# Altium PCB my_bcd_clock.PcbDoc
Units mm, origin at the board's own origin, x right, y up, seen from the top; angles counter-clockwise.
Board outline 91.25 x 54.75 mm, 2 copper layers (Top Layer, Bottom Layer); 50 components, 32 nets, 138 pads, 6 vias.
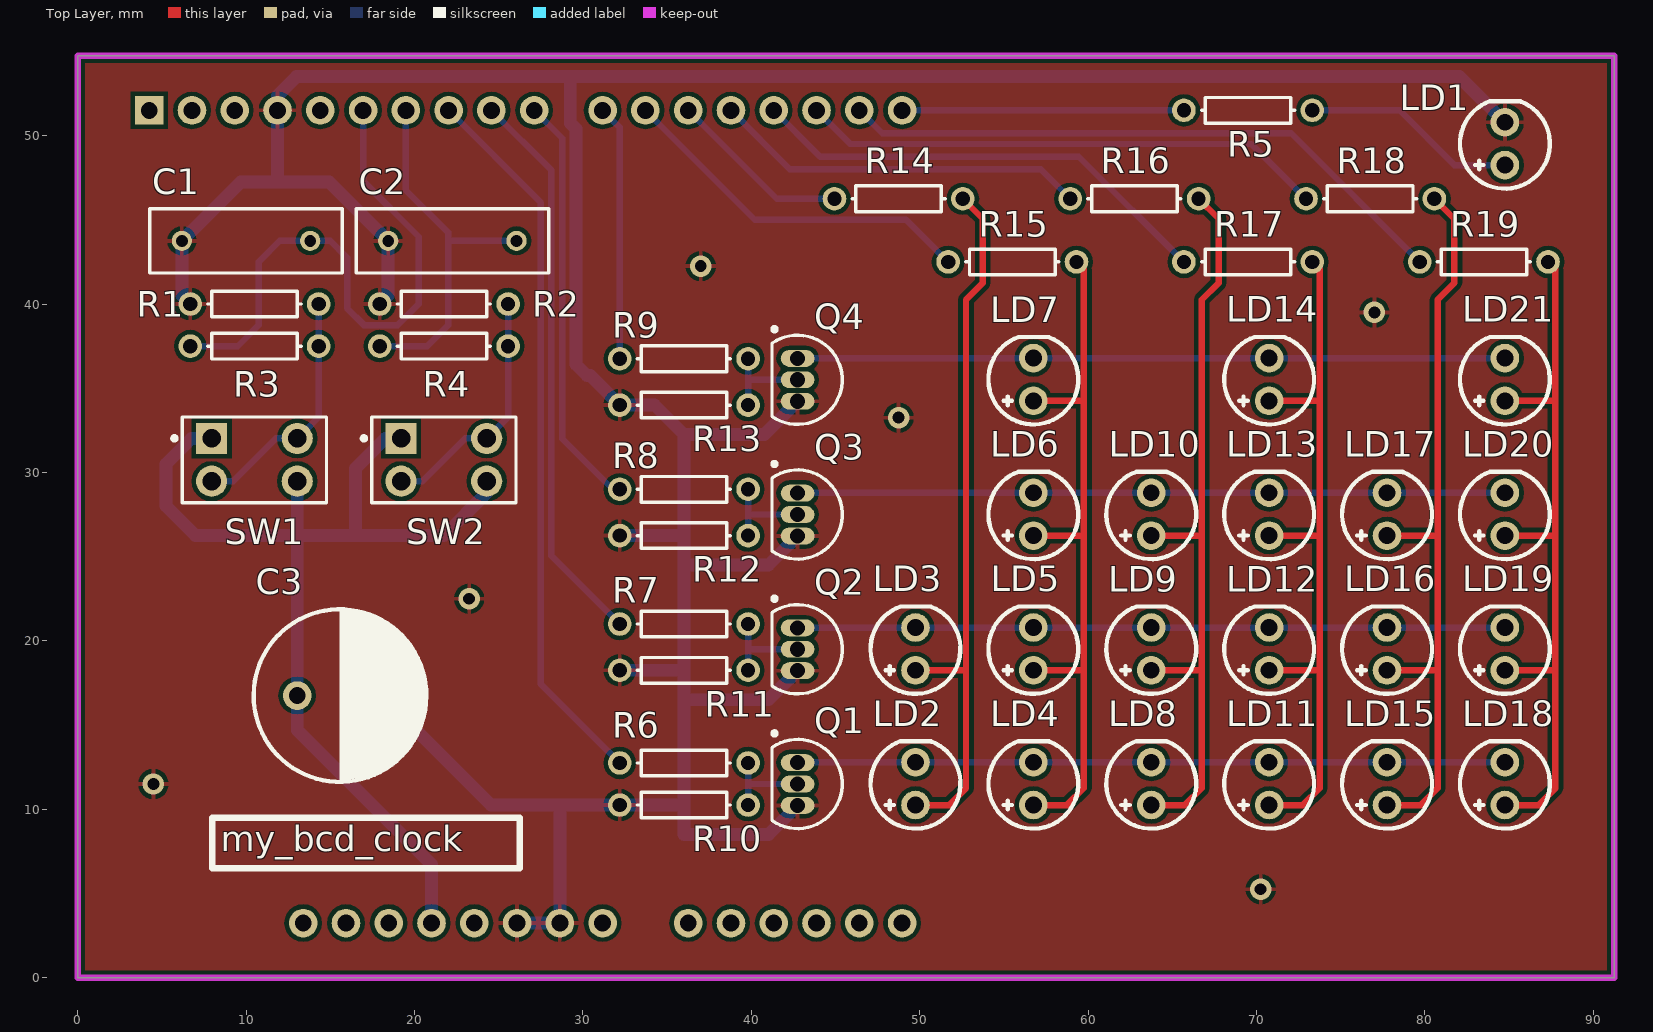
[diagram p0: Top Layer view]
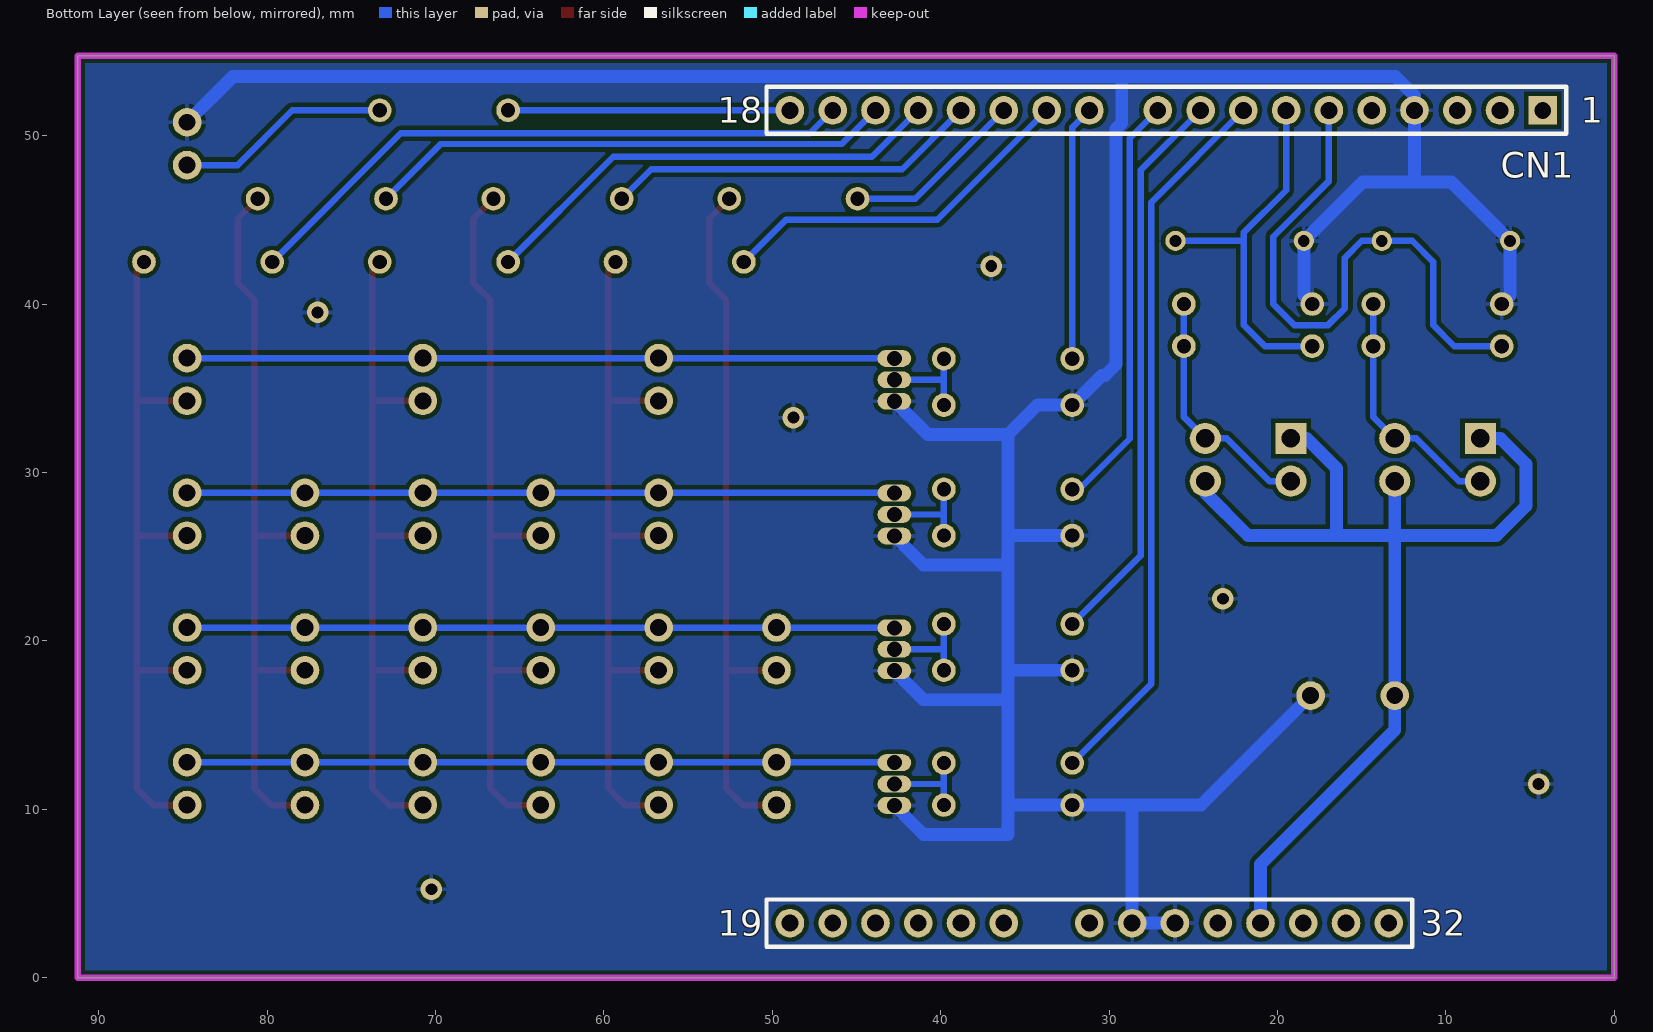
[diagram p1: Bottom Layer view, seen from below]

## Layer stack, top to bottom
Top Solder: solder mask 0.0102, Solder Resist, Dk 3.5
Top Layer: signal copper 0.0356
Dielectric1: dielectric 0.32, FR-4, Dk 4.8
Bottom Layer: signal copper 0.0356
Bottom Solder: solder mask 0.0102, Solder Resist, Dk 3.5

## Board outline
0,0 0,54.75 91.25,54.75 91.25,0

## Design rules (kind name [scope] priority, off if disabled: settings)
Clearance [All] p1: gap=0.254
FabricationTestPointUsage TestPointUsage [All] p1: valid=0 allowmultiple=FALSE
FabricationTestpoint Testpoint [All] p1: side=3 testpointundercomponent=TRUE minsize=1.016 maxsize=2.54 preferedsize=1.524 minholesize=0 maxholesize=1.016 preferedholesize=0.813 testpointgrid=0.025 allowsidetop=TRUE allowsidebottom=TRUE usegrid=TRUE gridtolerance=0
PolygonConnect [All] p1: connectstyle=Relief reliefconductorwidth=0.254 reliefentries=4 polygonreliefangle="90 Angle" airgapwidth=0.254
RoutingVias [All] p1: holewidth=0.711 width=1.27 viastyle="Through Hole" minholewidth=0.711 minwidth=1.27 maxholewidth=0.711 maxwidth=1.27
SilkToSolderMaskClearance SilkscreenOverComponentPads [IsPad] p1: minsilkscreentomaskgap=0.254 clearancetoexposedcopper=TRUE
SolderMaskExpansion [All] p1: expansion=0.102
Width [All] p1: maxlimit=2 minlimit=0.254 preferedwidth=0.381
27 further rules are at their usual default settings.

## Components (designator, comment, footprint, x,y, rotation, side; value= is the part's Value field where it differs from the comment)
C1 "10000pF" RAD-0.3 10,43.75 r180 top
C2 "10000pF" RAD-0.3 22.25,43.75 r180 top
C3 "10uF" RADIAL_CAN_5MM 13.04,16.75 r90 top
CN1 "ARDUINO_UNO_CONNECTOR" ARDUINO_UNO_CONNECTOR 4.25,51.5 r270 bottom
LD1 "LED_2.54MM" LED_2.54MM 84.75,48.25 r180 top
LD2 "LED_2.54MM" LED_2.54MM 49.75,10.25 r180 top
LD3 "LED_2.54MM" LED_2.54MM 49.75,18.25 r180 top
LD4 "LED_2.54MM" LED_2.54MM 56.75,10.25 r180 top
LD5 "LED_2.54MM" LED_2.54MM 56.75,18.25 r180 top
LD6 "LED_2.54MM" LED_2.54MM 56.75,26.25 r180 top
LD7 "LED_2.54MM" LED_2.54MM 56.75,34.25 r180 top
LD8 "LED_2.54MM" LED_2.54MM 63.75,10.25 r180 top
LD9 "LED_2.54MM" LED_2.54MM 63.75,18.25 r180 top
LD10 "LED_2.54MM" LED_2.54MM 63.75,26.25 r180 top
LD11 "LED_2.54MM" LED_2.54MM 70.75,10.25 r180 top
LD12 "LED_2.54MM" LED_2.54MM 70.75,18.25 r180 top
LD13 "LED_2.54MM" LED_2.54MM 70.75,26.25 r180 top
LD14 "LED_2.54MM" LED_2.54MM 70.75,34.25 r180 top
LD15 "LED_2.54MM" LED_2.54MM 77.75,10.25 r180 top
LD16 "LED_2.54MM" LED_2.54MM 77.75,18.25 r180 top
LD17 "LED_2.54MM" LED_2.54MM 77.75,26.25 r180 top
LD18 "LED_2.54MM" LED_2.54MM 84.75,10.25 r180 top
LD19 "LED_2.54MM" LED_2.54MM 84.75,18.25 r180 top
LD20 "LED_2.54MM" LED_2.54MM 84.75,26.25 r180 top
LD21 "LED_2.54MM" LED_2.54MM 84.75,34.25 r180 top
Q1 "2N2222" TO-226-AA 42.75,11.5 r180 top
Q2 "2N2222" TO-226-AA 42.75,19.5 r180 top
Q3 "2N2222" TO-226-AA 42.75,27.5 r180 top
Q4 "2N2222" TO-226-AA 42.75,35.5 r180 top
R1 "1K" AXIAL-0.3 10.5,40 r0 top
R2 "1K" AXIAL-0.3 21.75,40 r0 top
R3 "1K" AXIAL-0.3 10.5,37.5 r180 top
R4 "1K" AXIAL-0.3 21.75,37.5 r180 top
R5 "220R" AXIAL-0.3 69.5,51.5 r180 top
R6 "1K" AXIAL-0.3 36,12.75 r180 top
R7 "1K" AXIAL-0.3 36,21 r0 top
R8 "1K" AXIAL-0.3 36,29 r0 top
R9 "1K" AXIAL-0.3 36,36.75 r0 top
R10 "1K" AXIAL-0.3 36,10.25 r0 top
R11 "1K" AXIAL-0.3 36,18.25 r0 top
R12 "1K" AXIAL-0.3 36,26.25 r0 top
R13 "1K" AXIAL-0.3 36,34 r180 top
R14 "220R" AXIAL-0.3 48.75,46.25 r0 top
R15 "220R" AXIAL-0.3 55.5,42.5 r0 top
R16 "220R" AXIAL-0.3 62.75,46.25 r0 top
R17 "220R" AXIAL-0.3 69.5,42.5 r0 top
R18 "220R" AXIAL-0.3 76.75,46.25 r0 top
R19 "220R" AXIAL-0.3 83.5,42.5 r0 top
SW1 "SW-DPST" DPST-4 10.5,30.75 r0 top
SW2 "SW-DPST" DPST-4 21.75,30.75 r0 top

## Footprints (in the part's own frame and the unit in brackets; to place one, negate y for a bottom-side part, rotate by r counter-clockwise, add the part's x,y. Pads: shape width x height; smd on the part's side, far side on the other; paste and mask are expansions set on the pad)
ARDUINO_UNO_CONNECTOR [mm]
  rect 1.7x1.7 hole 1: 1(0,0)
  round 1.7 hole 1: 2(0,-2.54) 3(0,-5.08) 4(0,-7.62) 5(0,-10.16) 6(0,-12.7) 7(0,-15.24) 8(0,-17.78) 9(0,-20.32) 10(0,-22.86) 11(0,-26.924) 12(0,-29.464) 13(0,-32.004) 14(0,-34.544) 15(0,-37.084) 16(0,-39.624) 17(0,-42.164) 18(0,-44.704) 19(48.26,-44.704) 20(48.26,-42.164) 21(48.26,-39.624) 22(48.26,-37.084) 23(48.26,-34.544) 24(48.26,-32.004) 25(48.26,-26.924) 26(48.26,-24.384) 27(48.26,-21.844) 28(48.26,-19.304) 29(48.26,-16.764) 30(48.26,-14.224) 31(48.26,-11.684) 32(48.26,-9.144)
  silkscreen extent -1.4,-46.1 49.66,1.4
AXIAL-0.3 [mm] "Axial Device, Thru-Hole; 2 Leads; 0.3 in Pin Spacing"
  round 1.4 hole 0.85: 1(-3.81,0) 2(3.81,0)
  silkscreen extent -2.77,-0.76 2.77,0.76
DPST-4 [mm] "Switch; 4 Leads"
  rect 1.85x1.85 hole 1.1: 1(-2.54,1.27)
  round 1.85 hole 1.1: 2(-2.54,-1.27) 3(2.54,-1.27) 4(2.54,1.27)
  silkscreen extent -4.88,-2.54 4.28,2.54
LED_2.54MM [mm]
  round 1.7 hole 1: 1(0,0) 2(0,-2.54)
  silkscreen extent -2.67,-3.79 2.67,1.4
RAD-0.3 [mm] "Radial Cap, Thru-Hole; 2 Leads; 0.3 in Pin Spacing"
  round 1.2 hole 0.7: 1(-3.81,0) 2(3.81,0)
  silkscreen extent -5.71,-1.9 5.71,1.91
RADIAL_CAN_5MM [mm]
  round 1.7 hole 1: 1(0,0) 2(0,-5)
  silkscreen extent -5.12,-7.75 5.12,2.59
TO-226-AA [mm] "TO, Flat Index; 3 In-Line, Axial Leads; Body Dia. 4.8mm; Leads 0.55 x 0.51 mm (max)"
  oval 2x1 hole 0.9: 1(0,-1.27) 2(0,0) 3(0,1.27)
  silkscreen extent -2.65,-3.13 1.52,2.65, body extent -2.66,-2.66 1.52,2.66, height 5.33

## Part data
C1 C2: library part Cap, "Capacitor"
C3: library part "Cap Pol1", "Capacitor"
CN1: "Connector"
LD1 LD2 LD3 LD4 LD5 LD6 LD7 LD8 LD9 LD10 LD11 LD12 LD13 LD14 LD15 LD16 LD17 LD18 LD19 LD20 LD21: library part LED0, "LED"
Q1 Q2 Q3 Q4: library part NPN, "NPN"
R1 R2 R3 R4 R5 R6 R7 R8 R9 R10 R11 R12 R13 R14 R15 R16 R17 R18 R19: library part Res1, "Resistor"
SW1 SW2: "Switch"

## Via types
v1: diameter 1.27, hole 0.711, Top Layer to Bottom Layer, 6 vias

## Nets (pads, with @x,y where several pads share a name; then routed paths per layer and width w, separated by ;. In a path a pad name is that pad's centre, name@x,y a point inside that pad or via, vN(x,y) a via of type N, cw(c..) or ccw(c..) an arc to the next point about the centre after c; other vN are vias at no path point)
3V3: C3.1 CN1.29 SW1.1 SW1.3 SW2.1 SW2.3 | length 64.3
  Bottom Layer w0.762: SW1.1 6.77,32.02 5.25,30.5 5.25,28 7,26.25 13.04,26.25 ; SW1.3 13.04,26.25 ; SW2.1 18.27,32.02 16.5,30.25 16.5,26.25 ; CN1.29 21.014,6.736 13.04,14.71 13.04,26.25 ; SW2.3 24.29,28.79 21.75,26.25 16.5,26.25 ; 13.04,26.25 16.5,26.25
ALARM_LED: CN1.18 R5.2 | length 16.7
  Bottom Layer w0.381: CN1.18 R5.2
BUTTON_1: C1.1 CN1.6 R3.2 | length 35.6
  Bottom Layer w0.381: R3.2 9.5,37.5 10.75,38.75 10.75,42.5 12,43.75 C1.1 15,43.75 16,42.75 16,39.75 17,38.75 19,38.75 20.25,40 20.25,44 16.95,47.3 CN1.6
BUTTON_2: C2.1 CN1.7 R4.2 | length 22.4
  Bottom Layer w0.381: R4.2 20.75,37.5 22,38.75 22,43.75 ; CN1.7 19.49,46.76 22,44.25 22,43.75 ; C2.1 22,43.75
COLUMN_0: CN1.13 R14.1 | length 10.9
  Bottom Layer w0.381: CN1.13 41.504,46.25 R14.1
COLUMN_1: CN1.12 R15.1 | length 21.7
  Bottom Layer w0.381: CN1.12 40.214,45 49.19,45 R15.1
COLUMN_2: CN1.14 R16.1 | length 22.3
  Bottom Layer w0.381: CN1.14 42.294,48 57.19,48 R16.1
COLUMN_3: CN1.15 R17.1 | length 28.1
  Bottom Layer w0.381: CN1.15 44.084,48.75 59.44,48.75 R17.1
COLUMN_4: CN1.16 R18.1 | length 31.2
  Bottom Layer w0.381: CN1.16 45.874,49.5 69.69,49.5 R18.1
COLUMN_5: CN1.17 R19.1 | length 37
  Bottom Layer w0.381: CN1.17 47.779,50.135 72.055,50.135 R19.1
GND: C1.2 C2.2 C3.2 CN1.4 CN1.26 CN1.27 LD1.2 Q1.3 Q2.3 Q3.3 Q4.3 R1.1 R2.1 R10.1 R11.1 R12.1 R13.2 | length 219.7
  Bottom Layer w0.762: R1.1 6.19,40.5 C1.2 9.69,47.25 14.94,47.25 C2.2 18.44,40.5 R2.1 ; 11.87,47.25 CN1.4 11.87,52.37 13,53.5 82.04,53.5 LD1.2 ; C3.2 24.54,10.25 28.634,10.25 ; CN1.27 CN1.26 28.634,10.25 ; 29.25,53.5 29.25,50.75 29.596,50.404 29.596,36.404 30.25,35.75 30.44,35.75 R13.2 34.25,34 36,32.25 ; R11.1 36,18.25 ; R12.1 35.75,26.25 36,26.5 ; Q1.3 41.02,8.5 36,8.5 36,10.25 ; Q2.3 41.02,16.5 36,16.5 ; Q3.3 41.02,24.5 36,24.5 ; Q4.3 40.77,32.25 36,32.25 ; 28.634,10.25 R10.1 36,10.25 ; 36,10.25 36,16.5 ; 36,16.5 36,18.25 ; 36,18.25 36,24.5 ; 36,24.5 36,26.5 ; 36,26.5 36,32.25
  other v1: 70.25,5.25 4.5,11.5 23.25,22.5 48.75,33.25 77,39.5 37,42.25
NetLD1_1: LD1.1 R5.1 | length 12.8
  Bottom Layer w0.381: R5.1 78.5,51.5 81.75,48.25 LD1.1
NetLD2_1: LD2.1 LD3.1 R14.2 | length 42.3
  Top Layer w0.381: LD2.1 51.75,10.25 52.75,11.25 52.75,18.25 ; LD3.1 52.75,18.25 ; R14.2 53.75,45.06 53.75,41.25 52.75,40.25 52.75,18.25
NetLD2_2: LD2.2 LD4.2 LD8.2 LD11.2 LD15.2 LD18.2 Q1.1 | length 42
  Bottom Layer w0.381: Q1.1@42.77,12.79 LD2.2 LD4.2 LD8.2 LD11.2 LD15.2 LD18.2
NetLD3_2: LD3.2 LD5.2 LD9.2 LD12.2 LD16.2 LD19.2 Q2.1 | length 42
  Bottom Layer w0.381: Q2.1@42.77,20.79 LD3.2 LD5.2 LD9.2 LD12.2 LD16.2 LD19.2
NetLD4_1: LD4.1 LD5.1 LD6.1 LD7.1 R15.2 | length 43.4
  Top Layer w0.381: LD4.1 58.75,10.25 59.75,11.25 59.75,18.25 ; LD5.1 59.75,18.25 ; LD6.1 59.75,26.25 ; LD7.1 59.655,34.25 ; R15.2@59.56,42.25 59.75,42.06 59.75,26.25 ; 59.75,18.25 59.75,26.25
NetLD6_2: LD6.2 LD10.2 LD13.2 LD17.2 LD20.2 Q3.1 | length 42
  Bottom Layer w0.381: Q3.1@42.77,28.79 LD6.2 LD10.2 LD13.2 LD17.2 LD20.2
NetLD7_2: LD7.2 LD14.2 LD21.2 Q4.1 | length 42
  Bottom Layer w0.381: Q4.1@42.77,36.79 LD7.2 LD14.2 LD21.2
NetLD8_1: LD8.1 LD9.1 LD10.1 R16.2 | length 45.3
  Top Layer w0.381: LD8.1 65.75,10.25 66.75,11.25 66.75,18.25 ; LD9.1 66.75,18.25 ; LD10.1 66.75,26.25 ; R16.2 67.75,45.06 67.75,41.25 66.75,40.25 66.75,26.25 ; 66.75,18.25 66.75,26.25
NetLD11_1: LD11.1 LD12.1 LD13.1 LD14.1 R17.2 | length 43.5
  Top Layer w0.381: LD11.1 72.75,10.25 73.75,11.25 73.75,18.25 ; LD12.1 73.75,18.25 ; LD13.1 73.75,26.25 ; LD14.1 73.75,34.25 ; R17.2@73.56,42.25 73.75,42.06 73.75,34.25 ; 73.75,18.25 73.75,26.25 ; 73.75,26.25 73.75,34.25
NetLD15_1: LD15.1 LD16.1 LD17.1 R18.2 | length 45.3
  Top Layer w0.381: LD15.1 79.75,10.25 80.75,11.25 80.75,18.25 ; LD16.1 80.75,18.25 ; LD17.1 80.75,26.25 ; R18.2 81.75,45.06 81.75,41.25 80.75,40.25 80.75,18.25
NetLD18_1: LD18.1 LD19.1 LD20.1 LD21.1 R19.2 | length 43.5
  Top Layer w0.381: LD18.1 86.75,10.25 87.75,11.25 87.75,26.25 ; LD19.1 87.75,18.25 ; LD20.1 87.75,26.25 ; LD21.1 87.75,34.25 ; R19.2@87.56,42.25 87.75,42.06 87.75,34.25 ; 87.75,26.25 87.75,34.25
NetQ1_2: Q1.2 R6.1 R10.2 | length 5.4
  Bottom Layer w0.381: R10.2 39.81,11.5 ; R6.1 39.81,11.5 ; Q1.2 39.81,11.5
NetQ2_2: Q2.2 R7.2 R11.2 | length 5.7
  Bottom Layer w0.381: R11.2 39.81,19.5 ; R7.2 39.81,19.5 ; Q2.2 39.81,19.5
NetQ3_2: Q3.2 R8.2 R12.2 | length 5.7
  Bottom Layer w0.381: R12.2 39.81,27.5 ; R8.2 39.81,27.5 ; Q3.2 39.81,27.5
NetQ4_2: Q4.2 R9.2 R13.1 | length 5.7
  Bottom Layer w0.381: R13.1 39.81,35.5 ; R9.2 39.81,35.5 ; Q4.2 39.81,35.5
NetR1_2: R1.2 R3.1 SW1.2 SW1.4 | length 14.6
  Bottom Layer w0.381: SW1.2 9.23,29.48 11.77,32.02 SW1.4 14.31,33.29 R3.1 R1.2
NetR2_2: R2.2 R4.1 SW2.2 SW2.4 | length 14.6
  Bottom Layer w0.381: SW2.2 20.48,29.48 23.02,32.02 SW2.4 25.56,33.29 R2.2
ROW_0: CN1.11 R9.1 | length 15.2
  Bottom Layer w0.381: CN1.11 32.19,50.484 R9.1
ROW_1: CN1.10 R8.1 | length 24.9
  Bottom Layer w0.381: CN1.10 28.77,49.84 28.77,32 31.77,29 R8.1
ROW_2: CN1.9 R7.1 | length 33.7
  Bottom Layer w0.381: CN1.9 28.135,47.935 28.135,25.055 R7.1
ROW_3: CN1.8 R6.2 | length 43
  Bottom Layer w0.381: CN1.8 27.5,46.03 27.5,17.44 R6.2
pads on no net: CN1.1 CN1.2 CN1.3 CN1.5 CN1.19 CN1.20 CN1.21 CN1.22 CN1.23 CN1.24 CN1.25 CN1.28 CN1.30 CN1.31 CN1.32

## Polygon pours and split planes (outlines as drawn)
GND on Bottom Layer "Bottom Layer-No Net" (solid, remove dead copper, pour order 8): 0,54.75 91.25,54.75 91.25,0 0,0
GND on Top Layer "Bottom Layer-No Net" (solid, remove dead copper, pour order 10): 0,54.75 91.25,54.75 91.25,0 0,0

## Keep-outs
Keep-Out Layer:
  lines w0.381: 0,0 91.25,0 91.25,54.75 ; 0,0 0,0 ; 0,0 0,54.75 91.25,54.75 ; 91.25,54.75 91.25,54.75

## Silkscreen, mask and mechanical layers (free items; w line width, h text height)
Top Overlay:
  lines w0.381: 8.25,9.5 26.25,9.5 26.25,6.5 11.75,6.5 8,6.5 8,9.5 8.5,9.5
  text "my_bcd_clock" at 8.5,7.5 h1.52
Bottom Overlay:
  text "1" at 2,50.75 h1.52
  text "18" at 53.25,50.75 h1.52
  text "32" at 11.5,2.5 h1.52
  text "19" at 53.25,2.5 h1.52
Mechanical 1:
  lines w0.381: 0,54.75 91.25,54.75 ; 0,54.75 0,0 91.25,0 91.25,54.75 ; 0,54.75 0,54.75 ; 91.25,54.75 91.25,54.75
Mechanical 16:
  drawing of 1874 lines, arcs and shapes, not listed
  text "1" at -29.286,135.509 h1.78
  text "2" at 43.358,135.509 h1.78
  text "3" at 116.51,135.509 h1.78
  text "A" at -63.627,112.497 h1.78
  text "B" at -63.627,64.44 h1.78
  text "B" at 223.393,64.44 h1.78
  text "C" at -63.627,15.926 h1.78
  text "C" at 223.393,15.926 h1.78
  text "4" at 56.158,8.759 h1.78
  text "ENGINEER:" at 108.458,-21.082 h1.14
  text "TITLE:" at 146.558,-21.082 h1.14
  text "PCB DESIGNER:" at 108.458,-28.575 h1.14
  text "D" at -63.627,-32.08 h1.78
  text "D" at 223.393,-32.08 h1.78
  text "DATE:" at 108.458,-36.322 h1.14
  text "PART NO.:" at 146.558,-36.322 h1.14
  text "REV:" at 199.898,-36.322 h1.14
  text "Altium Limited" at 75.438,-38.862 h1.78
  text ".PRINT_DATE" at 109.728,-39.37 h1.78
  text "12a Rodborough Rd" at 75.438,-41.402 h1.78
  text "Frenchs Forest" at 75.438,-43.942 h1.78
  text "FILE NAME:" at 108.458,-43.942 h1.14
  text "DWG NO:" at 146.558,-43.942 h1.14
  text "SCALE:" at 199.898,-43.942 h1.14
  text "NSW 2086" at 75.438,-46.482 h1.78
  text ".PCB_FILE_NAME_NO_PATH" at 109.728,-46.99 h1.78
  text "1" at -29.286,-52.451 h1.78
  text "2" at 43.358,-52.451 h1.78
  text "3" at 116.51,-52.451 h1.78
  text "4" at 189.408,-52.451 h1.78